# EAGLE board DualHBridge-IR2302 (EAGLE 6.4)

Size 50.8 x 34.29 mm. Coordinates in mm from the lower left corner, seen from the top.
Outline: 0,34.29 0,0 50.8,0 50.8,34.29 0,34.29
Copper layers (1*16): Top 0.0356mm / dielectric 1.5011mm / Bottom 0.0356mm
Design rules "LaenPCBOrder": minimum track width 6mil, minimum drill 13mil, track to track 6mil, track to pad 6mil, pad to pad 6mil, via to via 6mil, smd to smd 6mil, copper to edge 15mil, drill to drill 6mil, minimum pad ring 7mil, minimum via ring 7mil, stop-mask expansion 4mil, vias tented up to drill 0mil, thermal gap 10mil

## Footprints (pad centres in the part's own frame; a part is rotated, then mirrored left to right if it is on the bottom)
D-5 = drill 0.813 octagon: A 2.54,0; C -2.54,0
DIL8 = drill 0.813 long: 1 -3.81,-3.81; 2 -1.27,-3.81; 3 1.27,-3.81; 4 3.81,-3.81; 5 3.81,3.81; 6 1.27,3.81; 7 -1.27,3.81; 8 -3.81,3.81
C025-024X044 = drill 0.813 octagon: 1 -1.27,0; 2 1.27,0
TO220V = drill 1.016 long: 1 -2.54,-2.54; 2 0,-2.54; 3 2.54,-2.54
1,6/0,8 = drill 0.813 pad 1.6 octagon: 1 0,0
2,8 = hole 2.8: 0,0
W237-102 = drill 1.194 long: 1 -2.5,-1.27; 2 2.5,-1.27

## Placement (x,y rotation side)
E$1  [D-5]  26.42,5.84 180 top
E$2  [DIL8]  26.42,8.38 270 top
E$3  [C025-024X044]  25.15,9.65 90 top
E$4  [C025-024X044]  27.69,9.65 90 top
E$5  [TO220V]  36.83,14.22 0 top
E$6  [TO220V]  36.83,8.89 0 top
E$7  [D-5]  5.59,5.84 180 top
E$8  [DIL8]  5.59,8.38 270 top
E$9  [C025-024X044]  4.32,9.65 90 top
E$10  [C025-024X044]  6.86,9.65 90 top
E$11  [TO220V]  16,14.22 0 top
E$12  [TO220V]  16,8.89 0 top
E$13  [1,6/0,8]  17.27,2.29 0 top
E$14  [1,6/0,8]  38.1,2.54 0 top
E$15  [D-5]  35.05,23.62 180 top
E$16  [1,6/0,8]  4.32,15.75 0 top
E$17  [1,6/0,8]  6.86,18.29 0 top
E$18  [1,6/0,8]  6.86,20.83 0 top
E$19  [1,6/0,8]  4.32,23.37 0 top
E$20  [1,6/0,8]  6.86,23.37 0 top
E$21  [1,6/0,8]  6.86,15.75 0 top
E$23  [DIL8]  35.05,26.16 270 top
E$24  [C025-024X044]  33.78,27.43 90 top
E$25  [C025-024X044]  36.32,27.43 90 top
E$26  [TO220V]  45.47,29.46 0 top
E$27  [1,6/0,8]  4.32,18.29 0 top
E$28  [TO220V]  45.47,24.13 0 top
E$29  [D-5]  14.22,23.62 180 top
E$30  [DIL8]  14.22,26.16 270 top
E$31  [C025-024X044]  12.95,27.43 90 top
E$32  [C025-024X044]  15.49,27.43 90 top
E$33  [1,6/0,8]  4.32,20.83 0 top
E$34  [TO220V]  24.64,29.46 0 top
E$35  [TO220V]  24.64,24.13 0 top
E$36  [1,6/0,8]  26.16,31.75 0 top
E$37  [1,6/0,8]  46.74,31.75 0 top
E$38  [1,6/0,8]  1.78,20.83 0 top
E$40  [2,8]  5.08,29.21 0 top
E$41  [1,6/0,8]  1.78,23.37 0 top
E$42  [2,8]  45.72,5.08 0 top
E$43  [W237-102]  46.23,14.22 90 top

## Library data of the parts
E$1 E$7 E$15 E$29 = diode
E$2 E$8 E$23 E$30 = microchip
E$3 E$4 E$9 E$10 E$24 E$25 E$31 E$32 = rcl
E$5 E$6 E$11 E$12 E$26 E$28 E$34 E$35 = linear
E$13 E$14 E$16-E$21 E$27 E$33 E$36-E$38 E$41 = wirepad
E$40 E$42 = holes
E$43 = con-wago-500

## Nets
S$1: E$1.A E$2.1 E$3.2 E$5.2 E$7.A E$8.1 E$9.2 E$11.2 E$15.A E$23.1 E$24.2 E$26.2 E$29.A E$30.1 E$31.2 E$34.2 E$43.2
S$2: E$2.4 E$3.1 E$6.3 E$8.4 E$9.1 E$12.3 E$23.4 E$24.1 E$28.3 E$30.4 E$31.1 E$35.3 E$38.1 E$43.1
S$3: E$19.1 E$30.2
S$4: E$1.C E$2.8 E$4.2
S$5: E$2.2 E$16.1
S$6: E$2.6 E$4.1 E$5.3 E$6.2 E$14.1
S$7: E$2.7 E$5.1
S$8: E$2.5 E$6.1
S$10: E$20.1 E$30.3
S$11: E$23.2 E$33.1
S$12: E$7.C E$8.8 E$10.2
S$13: E$2.3 E$21.1
S$14: E$8.6 E$10.1 E$11.3 E$12.2 E$13.1
S$15: E$8.7 E$11.1
S$17: E$8.2 E$27.1
S$18: E$15.C E$23.8 E$25.2
S$20: E$23.6 E$25.1 E$26.3 E$28.2 E$37.1
S$21: E$23.7 E$26.1
S$22: E$23.5 E$28.1
S$25: E$29.C E$30.8 E$32.2
S$27: E$30.6 E$32.1 E$34.3 E$35.2 E$36.1
S$28: E$30.7 E$34.1
S$29: E$30.5 E$35.1
S$31: E$18.1 E$23.3
S$32: E$8.3 E$17.1
S$33: E$8.5 E$12.1

## Tracks (layer width: path | path; a pad name or v marks a point on that pad's centre or on a via)
S$1  (16 unrouted)
S$2  (13 unrouted)
S$3  (1 unrouted)
S$4  (2 unrouted)
S$5  (1 unrouted)
S$6  (4 unrouted)
S$7  (1 unrouted)
S$8  (1 unrouted)
S$10  (1 unrouted)
S$11  (1 unrouted)
S$12  (2 unrouted)
S$13  (1 unrouted)
S$14  (4 unrouted)
S$15  (1 unrouted)
S$17  (1 unrouted)
S$18  (2 unrouted)
S$20  (4 unrouted)
S$21  (1 unrouted)
S$22  (1 unrouted)
S$25  (2 unrouted)
S$27  (4 unrouted)
S$28  (1 unrouted)
S$29  (1 unrouted)
S$31  (1 unrouted)
S$32  (1 unrouted)
S$33  (1 unrouted)

## Text on the board
tNames: Dual H-Bridge | O1 | O2 | Logic In | VCC | H1 | EN1 | GND | H2 | EN2 | H3 | EN3 | VDD | Power In | H4 | EN4 | GND | O3 | O4 | Brent M. Spell